# Altium PCB AT89S52精简开发板.PCBDOC (part 1 of 2)
Units mm, origin at the board's own origin, x right, y up, seen from the top; angles counter-clockwise.
Board outline 152.4 x 101.6 mm, 2 copper layers (Top Layer, Bottom Layer); 41 components, 53 nets, 208 pads, 4 vias.
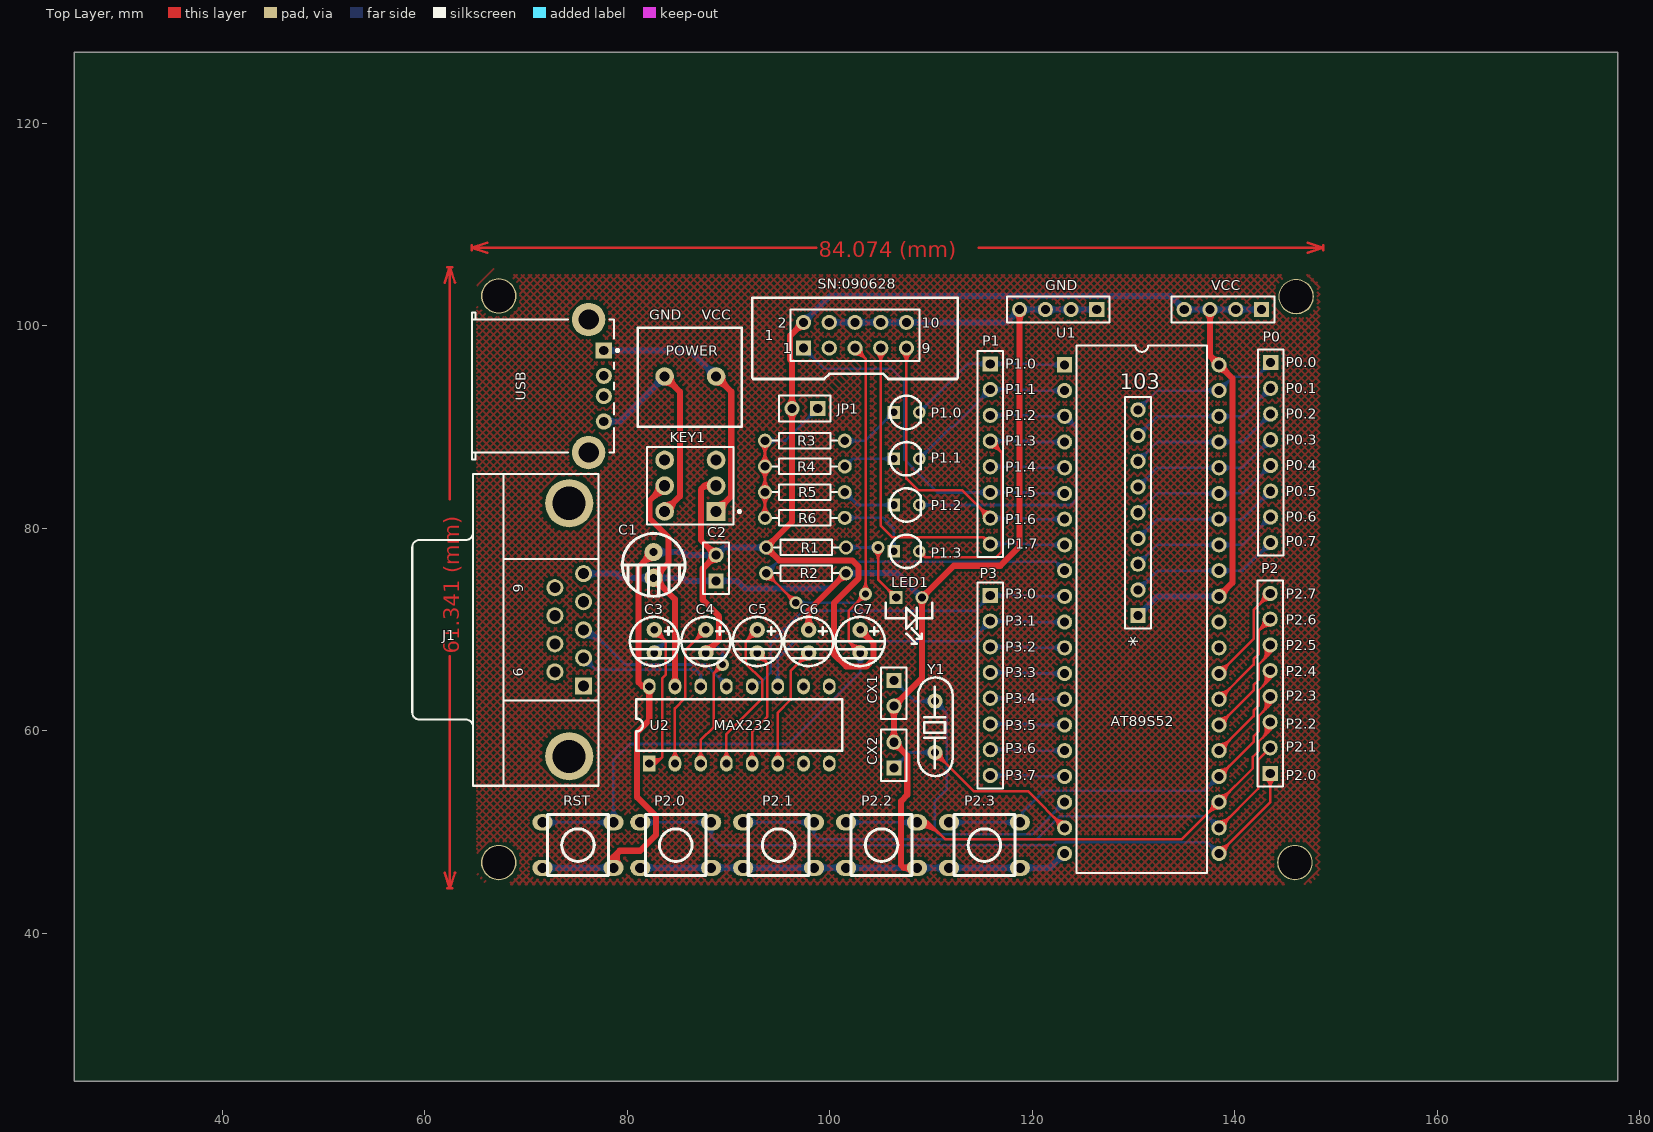
[diagram p0: Top Layer view]
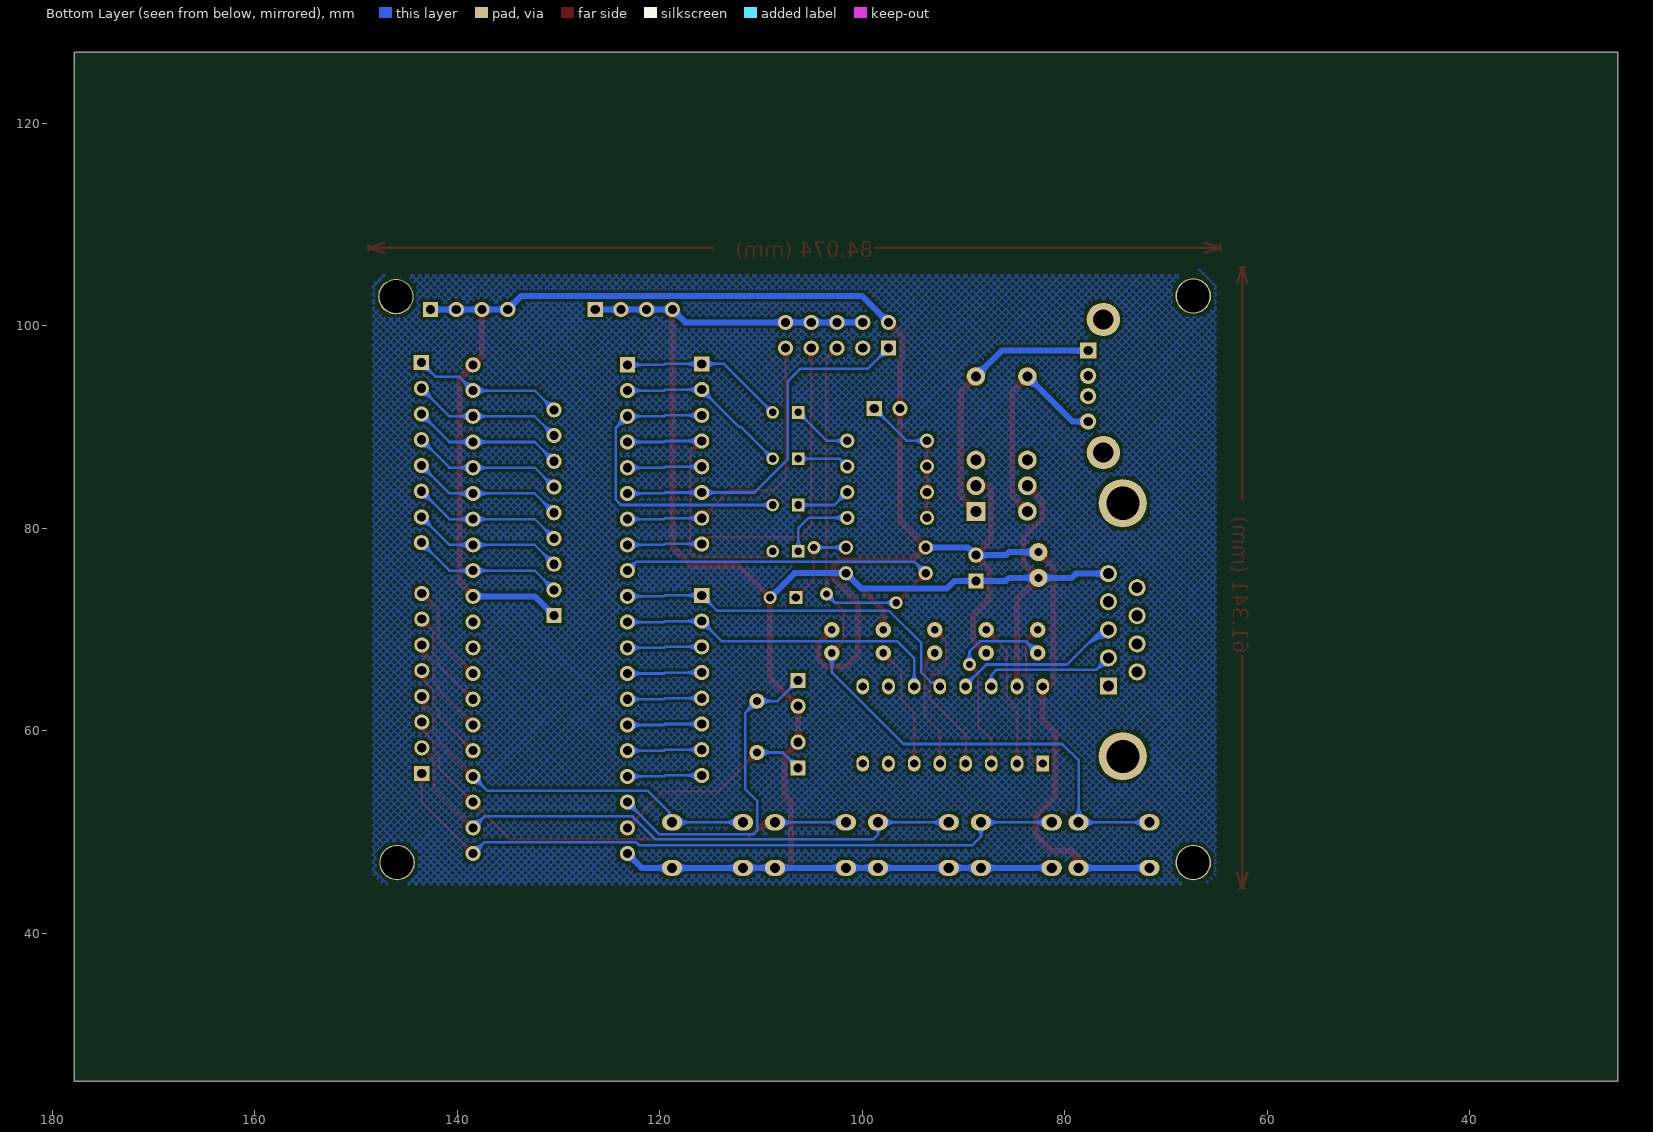
[diagram p1: Bottom Layer view, seen from below]

## Layer stack, top to bottom
Top Layer: signal copper 0.0356
Dielectric: dielectric 0.32, FR-4, Dk 4.8
Bottom Layer: signal copper 0.0356

## Board outline
25.4,25.4 177.8,25.4 177.8,127 25.4,127

## Design rules (kind name [scope] priority, off if disabled: settings)
Clearance [All] p1: gap=0.254
ComponentClearance [All] p1: gap=0.254 collisioncheckmode=3 verticalgap=0.254
PolygonConnect [All] p1: connectstyle=Relief reliefconductorwidth=0.254 reliefentries=4 polygonreliefangle="90 Angle"
RoutingVias [All] p1: holewidth=0.711 width=1.27 viastyle="Through Hole" minholewidth=0.711 minwidth=1.27 maxholewidth=0.711 maxwidth=1.27
SolderMaskExpansion [All] p1: expansion=0.102
TestPointUsage [All] p1: valid=0 allowmultiple=FALSE
Testpoint [All] p1: side=15 testpointundercomponent=TRUE minsize=1.016 maxsize=2.54 preferedsize=1.524 minholesize=0 maxholesize=1.016 preferedholesize=0.813 testpointgrid=0.025 style=1023 order=0-112345678
Width Width_4 [InNet('NetKEY1_6')] p1: maxlimit=0.6 minlimit=0.6 preferedwidth=0.6
Width Width_3 [InNet('NetKEY1_1')] p2: maxlimit=0.6 minlimit=0.6 preferedwidth=0.6
Width Width_2 [InNet('VCC')] p3: maxlimit=0.6 minlimit=0.6 preferedwidth=0.6
Width Width_1 [InNet('GND')] p4: maxlimit=0.6 minlimit=0.6 preferedwidth=0.6
Width [All] p5: maxlimit=0.254 minlimit=0.254 preferedwidth=0.254
17 further rules are at their usual default settings.

## Components (designator, comment, footprint, x,y, rotation, side; value= is the part's Value field where it differs from the comment)
1 "Download" HDR-2x5 102.489,97.917 r0 top
103 "" HDR-9 130.429,76.454 r270 top
C1 "100uF\25v" C-DJ-6 82.677,75.057 r270 top
C2 "CPDR" CPDR 88.773,76.073 r90 top
C3 "10uf" C-DJ-4 80.137,67.564 r270 top
C4 "10uf" C-DJ-4 85.217,67.564 r270 top
C5 "10uf" C-DJ-4 90.297,67.564 r270 top
C6 "10uf" C-DJ-4 95.377,67.564 r270 top
C7 "10uf" C-DJ-4 100.457,67.564 r270 top
CX1 "30p" HDR1X2 106.324,64.973 r270 top
CX2 "30p" HDR1X2 106.324,56.337 r90 top
GND "" HDR1X4 126.365,101.6 r180 top
J1 "D Connector 9" DSUB1.385-2H9 64.77,69.977 r90 top
JP1 "" HDR1X2 98.806,91.821 r180 top
KEY1 "SW-DPST" DPDT-6 86.233,84.201 r180 top
LED1 "LED" LED 108.585,72.644 r180 top
P0 "" HDR-8 143.51,83.693 r270 top
P1 "" HDR-8 115.824,83.566 r270 top
P1.0 "LED" LED_D 108.077,92.964 r0 top
P1.1 "LED" LED_D 108.077,88.392 r0 top
P1.2 "LED" LED_D 108.077,83.82 r0 top
P1.3 "LED" LED_D 108.077,79.248 r0 top
P2 "" HDR-8 143.51,68.453 r90 top
P2.0 "key1" an-6*6 78.613,53.848 r180 top
P2.1 "key2" an-6*6 88.773,53.848 r180 top
P2.2 "key3" an-6*6 98.933,53.848 r180 top
P2.3 "key4" an-6*6 109.093,53.848 r180 top
P3 "" HDR-8 115.824,60.706 r270 top
POWER "" JK128 88.265,93.853 r270 top
R1 "4.7k" RSE 97.663,78.105 r0 top
R2 "10k" RSE 97.663,75.565 r180 top
R3 "470" RSE 97.536,88.646 r0 top
R4 "470" RSE 97.536,86.106 r0 top
R5 "470" RSE 97.536,83.566 r0 top
R6 "470" RSE 97.536,81.026 r0 top
RST "" an-6*6 68.961,53.848 r180 top
U1 "AT89S52-24PI" DIP-40 130.81,72.009 r270 top
U2 "MAX232" DIP16 82.169,56.769 r90 top
USB "" USB-5V 75.184,90.424 r180 top
VCC "" HDR1X4 142.621,101.6 r180 top
Y1 "Y" JZ_ZC 110.388,62.941 r90 top

## Footprints (in the part's own frame and the unit in brackets; to place one, negate y for a bottom-side part, rotate by r counter-clockwise, add the part's x,y. Pads: shape width x height; smd on the part's side, far side on the other; paste and mask are expansions set on the pad)
an-6*6 [mm] "按键"
  oval 2x1.6 hole 1: 1(-9.675,7.381) 1(-2.675,7.381) 2(-9.675,2.881) 2(-2.675,2.881)
  silkscreen extent -9.17,2.13 -3.18,8.13
C-DJ-4 [mil] "电容4mm"
  round 60 hole 30: 1(-95,100) 2(-5,100)
  silkscreen extent -145,5 46,196
C-DJ-6 [mm] "电容6mm"
  round 1.8 hole 0.8: 1(-2.591,-0.076) 2(-0.051,-0.076)
  silkscreen extent -4.42,-3.18 1.78,3.02
CPDR [mm] "瓷片电容"
  rect 1.5x1.5 hole 0.9: 1(-1.27,0)
  round 1.5 hole 0.9: 2(1.27,0)
  silkscreen extent -2.54,-1.27 2.54,1.27
DIP16 [mil] "直插16管脚"
  rect 62x49.21 hole 32: 1(-0.15,-0.04)
  oval 62x49.21 hole 32: 2(-0.15,-100.04) 3(-0.15,-200.04) 4(-0.15,-300.04) 5(-0.15,-400.04) 6(-0.15,-500.04) 7(-0.15,-600.04) 8(-0.15,-700.04) 9(299.85,-700.04) 10(299.85,-600.04) 11(299.85,-500.04) 12(299.85,-400.04) 13(299.85,-300.04) 14(299.85,-200.04) 15(299.85,-100.04) 16(299.85,-0.04)
  silkscreen extent 50,-750 250,50
DIP-40 [mm] "直插40管脚"
  rect 1.5x1.5 hole 0.9: 1(-24.13,-7.62)
  round 1.5 hole 0.9: 2(-21.59,-7.62) 3(-19.05,-7.62) 4(-16.51,-7.62) 5(-13.97,-7.62) 6(-11.43,-7.62) 7(-8.89,-7.62) 8(-6.35,-7.62) 9(-3.81,-7.62) 10(-1.27,-7.62) 11(1.27,-7.62) 12(3.81,-7.62) 13(6.35,-7.62) 14(8.89,-7.62) 15(11.43,-7.62) 16(13.97,-7.62) 17(16.51,-7.62) 18(19.05,-7.62) 19(21.59,-7.62) 20(24.13,-7.62) 21(24.13,7.62) 22(21.59,7.62) 23(19.05,7.62) 24(16.51,7.62) 25(13.97,7.62) 26(11.43,7.62) 27(8.89,7.62) 28(6.35,7.62) 29(3.81,7.62) 30(1.27,7.62) 31(-1.27,7.62) 32(-3.81,7.62) 33(-6.35,7.62) 34(-8.89,7.62) 35(-11.43,7.62) 36(-13.97,7.62) 37(-16.51,7.62) 38(-19.05,7.62) 39(-21.59,7.62) 40(-24.13,7.62)
  silkscreen extent -26.05,-6.45 26.05,6.45
DPDT-6 [mm] "Double-Pole, Double-Throw Switch; 6 Leads"
  rect 1.85x1.85 hole 1.1: 1(-2.54,2.54)
  round 1.85 hole 1.1: 2(-2.54,0) 3(-2.54,-2.54) 4(2.54,-2.54) 5(2.54,0) 6(2.54,2.54)
  silkscreen extent -4.96,-3.81 4.28,3.81
DSUB1.385-2H9 [mm] "Connector; D Subminiature; 9 Position; Right Angle; Pitch 1.385 mm"
  rect 1.69x1.69 hole 1.09: 1(-5.54,-10.92)
  round 1.69 hole 1.09: 2(-2.77,-10.92) 3(0,-10.92) 4(2.77,-10.92) 5(5.54,-10.92) 6(-4.155,-8.08) 7(-1.385,-8.08) 8(1.385,-8.08) 9(4.155,-8.08)
  round 4.76 hole 3.26: 10(-12.495,-9.5) 11(12.495,-9.5)
  silkscreen extent -15.4,-12.4 15.4,6
HDR1X2 [mm] "Connector; Header; 2 Position"
  rect 1.5x1.5 hole 0.9: 1(0,0)
  round 1.5 hole 0.9: 2(2.54,0)
  silkscreen extent -1.27,-1.27 3.81,1.27
HDR1X4 [mm] "Connector; Header; 4 Position"
  rect 1.5x1.5 hole 0.9: 1(0,0)
  round 1.5 hole 0.9: 2(2.54,0) 3(5.08,0) 4(7.62,0)
  silkscreen extent -1.27,-1.27 8.89,1.27
HDR-2x5 [mm] "下载口"
  rect 1.5x1.5 hole 0.9: 1(-5.08,-0.127)
  round 1.5 hole 0.9: 2(-5.08,2.413) 3(-2.54,-0.127) 4(-2.54,2.413) 5(0,-0.127) 6(0,2.413) 7(2.54,-0.127) 8(2.54,2.413) 9(5.08,-0.127) 10(5.08,2.413)
  silkscreen extent -10.16,-3.17 10.16,4.83
HDR-8 [mm] "8排针"
  rect 1.5x1.5 hole 0.9: 1(-12.669,0.023)
  round 1.5 hole 0.9: 2(-10.129,0.023) 3(-7.589,0.023) 4(-5.049,0.023) 5(-2.509,0.023) 6(0.031,0.023) 7(2.571,0.023) 8(5.111,0.023)
  silkscreen extent -13.94,-1.25 6.38,1.29
HDR-9 [mm] "9排针"
  round 1.5 hole 0.9: 1(-15.24,0) 2(-12.7,0) 3(-10.16,0) 4(-7.62,0) 5(-5.08,0) 6(-2.54,0) 7(0,0) 8(2.54,0)
  rect 1.5x1.5 hole 0.9: 9(5.08,0)
  silkscreen extent -16.51,-1.27 6.35,1.27
JK128 [mil] "接线端子"
  round 71.81 hole 39.37: 1(-45,20) 2(-45,-180)
  silkscreen extent -235,-285 150,120
JZ_ZC [mil] "晶振"
  round 60 hole 30: 1(-200,0) 2(0,0)
  silkscreen extent -292,-68 92,65
LED [mil] "发光二极管"
  rect 50x50 hole 32: 1(80,-20)
  round 50 hole 32: 2(-20,-20)
  silkscreen extent -60,0 120,160
LED_D [mm] "发光二极管_3mm"
  rect 1.25x1.25 hole 0.75: 1(-1.778,-1.524)
  round 1.25 hole 0.75: 2(0.762,-1.524)
  silkscreen extent -2.16,-3.17 0.89,0.13
RSE [mm] "直插电阻1/8W"
  round 1.4 hole 0.85: 1(-3.937,0) 2(3.937,0)
  silkscreen extent -3.17,-0.76 3.17,0.76
USB-5V [mm] "USB接口"
  rect 1.6x1.6 hole 0.92: 1(-2.503,-7.123)
  round 1.6 hole 0.92: 2(-2.503,-4.624) 3(-2.503,-2.624) 4(-2.503,-0.124)
  round 3.3 hole 2: 5(-1.002,2.947) 6(-1.002,-10.193)
  silkscreen extent -3.98,-10.87 10.5,3.63

## Part data
1: library part "Header 5X2", "Header, 5-Pin, Dual row"
103: library part PZ_9, "排针——9"
C1 C3 C4 C5 C6 C7: library part "CAPACITOR POL", "Capacitor"
C2: "瓷片电容"
CX1 CX2: library part CAP, "Capacitor"
GND USB VCC: library part "Header 4", "Header, 4-Pin"
J1: "Receptacle Assembly, 9 Position, Right Angle"
JP1 POWER: library part "Header 2", "Header, 2-Pin"
KEY1: "Double-Pole, Single-Throw Switch"
P0 P1 P2 P3: library part PZ_8, "排针——8"
P2.0 P2.1 P2.2 P2.3: library part key
R1 R2 R3 R4 R5 R6: library part RES2
RST: library part SW-PB, "Switch"
U1: library part AT89S52-P, "8 位微处理器/40引脚"
Y1: library part CRYSTAL, "Crystal"

## Free pads (board coordinates)
  round 3.5 hole 3.25: 0(67.31,46.99) 0(67.31,102.946) 0(145.923,46.99) 0(146.05,102.87)

## Via types
v1: diameter 1.27, hole 0.711, Top Layer to Bottom Layer, 4 vias

## Nets (pads, with @x,y where several pads share a name; then routed paths per layer and width w, separated by ;. In a path a pad name is that pad's centre, name@x,y a point inside that pad or via, vN(x,y) a via of type N, cw(c..) or ccw(c..) an arc to the next point about the centre after c; other vN are vias at no path point)
GND: 1.4 1.6 1.8 1.10 C1.2 C2.1 C6.1 CX1.2 CX2.2 GND.1 GND.2 GND.3 GND.4 J1.5 KEY1.5 LED1.2 P2.0.1 P2.1.1 P2.2.1 P2.3.1 R2.1 U1.20 U2.15 | length 292.6
  Top Layer w0.6: C1.2@82.601,74.508 cw(c82.601,73.059) 83.625,74.084 cw(c84.649,75.108) 83.201,75.108 cw(c84.649,75.108) 83.625,76.132 cw(c82.601,77.156) C1.2@82.601,75.708 ; KEY1.5@83.068,84.201 cw(c81.559,84.201) 82.626,83.134 cw(c83.693,82.067) KEY1.5@83.693,83.576 ; KEY1.5@83.693,84.201 82.194,82.702 82.194,80.975 84.074,79.096 84.074,76.581 C1.2@82.601,75.108 84.71,72.999 U2.15@84.71,64.385 ; U2.15@84.48,64.777 ccw(c83.925,65.332) 84.71,65.332 ccw(c85.495,65.332) U2.15@84.94,64.777 ; C6.1@97.59,70.304 ccw(c96.802,71.092) 97.917,71.092 ccw(c99.032,71.092) C6.1@98.244,70.304 ; C6.1@97.917,69.977 97.917,71.882 R2.1@101.6,75.565 ; R2.1@101.2,75.565 cw(c100.234,75.565) 100.917,74.882 cw(c101.6,74.199) R2.1@101.6,75.165 ; CX2.2@106.006,59.195 ccw(c105.238,59.964) 106.324,59.964 ccw(c107.411,59.964) CX2.2@106.643,59.195 ; CX1.2@106.006,62.115 cw(c105.238,61.347) 106.324,61.347 cw(c107.411,61.347) CX1.2@106.643,62.115 ; CX2.2@106.324,58.427 cw(c106.324,57.341) 107.093,58.109 cw(c107.861,58.877) CX2.2@106.774,58.877 ; CX1.2@106.324,62.883 ccw(c106.324,63.97) 107.093,63.201 ccw(c107.861,62.433) CX1.2@106.774,62.433 ; P2.2.1@108.032,46.138 ccw(c107.304,45.499) 107.304,46.467 ; P2.2.1@108.032,46.797 cw(c107.304,47.435) 107.304,46.467 ; P2.2.1@108.608,46.467 107.304,46.467 ; LED1.2@108.856,72.915 cw(c108.284,72.343) 109.093,72.343 cw(c109.902,72.343) LED1.2@109.33,72.915 ; LED1.2@109.093,73.487 ccw(c109.093,74.296) 109.665,73.724 ccw(c110.237,73.152) LED1.2@109.428,73.152 ; GND.4@118.427,101.282 cw(c117.659,100.514) 118.745,100.514 cw(c119.831,100.514) GND.4@119.063,101.282 ; GND.4@118.745,101.6 118.745,78.207 116.84,76.302 112.243,76.302 LED1.2@109.093,73.152 109.093,65.202 CX1.2@106.324,62.433 CX2.2@106.324,58.877 107.645,57.556 107.645,53.67 107.036,53.061 107.036,46.736 107.304,46.467
  Bottom Layer w0.6: J1.5@75.69,75.517 78.918,75.517 79.327,75.108 C1.2@82.601,75.108 85.522,75.108 85.827,74.803 C2.1@88.773,74.803 90.881,74.803 91.618,74.066 100.101,74.066 R2.1@101.6,75.565 106.68,75.565 LED1.2@109.093,73.152 ; J1.5@76.075,75.132 cw(c77.006,74.201) 77.006,75.517 cw(c77.006,76.833) J1.5@76.075,75.902 ; P2.0.1@81.288,46.467 P2.0.1@88.288,46.467 P2.1.1@91.448,46.467 P2.1.1@98.448,46.467 P2.2.1@101.608,46.467 P2.2.1@108.608,46.467 P2.3.1@111.768,46.467 P2.3.1@118.768,46.467 121.778,46.467 U1.20@123.19,47.879 ; P2.0.1@81.842,46.114 cw(c82.695,45.26) 82.695,46.467 cw(c82.695,47.674) P2.0.1@81.842,46.821 ; C1.2@82.177,74.684 ccw(c81.152,73.659) 81.152,75.108 ccw(c81.152,76.556) C1.2@82.177,75.532 ; C1.2@83.025,74.684 cw(c84.049,73.659) 84.049,75.108 cw(c84.049,76.556) C1.2@83.025,75.532 ; P2.0.1@87.734,46.114 ccw(c86.881,45.26) 86.881,46.467 ccw(c86.881,47.674) P2.0.1@87.734,46.821 ; C2.1@88.455,74.485 ccw(c87.687,73.717) 87.687,74.803 ccw(c87.687,75.889) C2.1@88.455,75.121 ; P2.0.1@88.842,46.114 cw(c89.695,45.26) 89.695,46.467 cw(c89.695,47.674) P2.0.1@88.842,46.821 ; C2.1@89.091,74.485 cw(c89.859,73.717) 89.859,74.803 cw(c89.859,75.889) C2.1@89.091,75.121 ; P2.1.1@90.894,46.114 ccw(c90.041,45.26) 90.041,46.467 ccw(c90.041,47.674) P2.1.1@90.894,46.821 ; P2.1.1@92.002,46.114 cw(c92.855,45.26) 92.855,46.467 cw(c92.855,47.674) P2.1.1@92.002,46.821 ; P2.1.1@97.894,46.114 ccw(c97.041,45.26) 97.041,46.467 ccw(c97.041,47.674) P2.1.1@97.894,46.821 ; P2.1.1@99.002,46.114 cw(c99.855,45.26) 99.855,46.467 cw(c99.855,47.674) P2.1.1@99.002,46.821 ; 1.4@99.949,100.33 1.6@102.489,100.33 1.8@105.029,100.33 1.10@107.569,100.33 117.475,100.33 GND.4@118.745,101.6 GND.3@121.285,101.6 GND.2@123.825,101.6 GND.1@126.365,101.6 ; 1.4@100.267,100.012 cw(c101.035,99.244) 101.035,100.33 cw(c101.035,101.416) 1.4@100.267,100.648 ; P2.2.1@101.054,46.114 ccw(c100.201,45.26) 100.201,46.467 ccw(c100.201,47.674) P2.2.1@101.054,46.821 ; R2.1@101.2,75.565 cw(c100.234,75.565) 100.917,74.882 cw(c101.6,74.199) R2.1@101.6,75.165 ; R2.1@101.883,75.282 cw(c102.566,74.599) 102.566,75.565 cw(c102.566,76.531) R2.1@101.883,75.848 ; P2.2.1@102.162,46.114 cw(c103.015,45.26) 103.015,46.467 cw(c103.015,47.674) P2.2.1@102.162,46.821 ; 1.6@102.171,100.012 ccw(c101.403,99.244) 101.403,100.33 ccw(c101.403,101.416) 1.6@102.171,100.648 ; 1.6@102.807,100.012 cw(c103.575,99.244) 103.575,100.33 cw(c103.575,101.416) 1.6@102.807,100.648 ; 1.8@104.711,100.012 ccw(c103.943,99.244) 103.943,100.33 ccw(c103.943,101.416) 1.8@104.711,100.648 ; 1.8@105.347,100.012 cw(c106.115,99.244) 106.115,100.33 cw(c106.115,101.416) 1.8@105.347,100.648 ; 1.10@107.251,100.012 ccw(c106.483,99.244) 106.483,100.33 ccw(c106.483,101.416) 1.10@107.251,100.648 ; 1.10@107.887,100.012 cw(c108.655,99.244) 108.655,100.33 cw(c108.655,101.416) 1.10@107.887,100.648 ; P2.2.1@108.054,46.114 ccw(c107.201,45.26) 107.201,46.467 ccw(c107.201,47.674) P2.2.1@108.054,46.821 ; LED1.2@108.758,73.152 ccw(c107.949,73.152) 108.521,73.724 ccw(c109.093,74.296) LED1.2@109.093,73.487 ; P2.2.1@109.162,46.114 cw(c110.015,45.26) 110.015,46.467 cw(c110.015,47.674) P2.2.1@109.162,46.821 ; P2.3.1@111.214,46.114 ccw(c110.361,45.26) 110.361,46.467 ccw(c110.361,47.674) P2.3.1@111.214,46.821 ; P2.3.1@112.322,46.114 cw(c113.175,45.26) 113.175,46.467 cw(c113.175,47.674) P2.3.1@112.322,46.821 ; P2.3.1@118.214,46.114 ccw(c117.361,45.26) 117.361,46.467 ccw(c117.361,47.674) P2.3.1@118.214,46.821 ; GND.4@118.295,101.6 cw(c117.209,101.6) 117.977,100.832 cw(c118.745,100.064) GND.4@118.745,101.15 ; GND.4@119.063,101.282 cw(c119.831,100.514) 119.831,101.6 cw(c119.831,102.686) GND.4@119.063,101.918 ; P2.3.1@119.322,46.114 cw(c120.175,45.26) 120.175,46.467 cw(c120.175,47.674) P2.3.1@119.322,46.821 ; GND.3@120.967,101.282 ccw(c120.199,100.514) 120.199,101.6 ccw(c120.199,102.686) GND.3@120.967,101.918 ; GND.3@121.603,101.282 cw(c122.371,100.514) 122.371,101.6 cw(c122.371,102.686) GND.3@121.603,101.918 ; U1.20@122.74,47.879 cw(c121.654,47.879) 122.422,47.111 cw(c123.19,46.343) U1.20@123.19,47.429 ; GND.2@123.507,101.282 ccw(c122.739,100.514) 122.739,101.6 ccw(c122.739,102.686) GND.2@123.507,101.918 ; GND.2@124.143,101.282 cw(c124.911,100.514) 124.911,101.6 cw(c124.911,102.686) GND.2@124.143,101.918 ; GND.1@126.047,101.282 ccw(c125.279,100.514) 125.279,101.6 ccw(c125.279,102.686) GND.1@126.047,101.918
NetC3_1: C3.1 U2.1 | length 23
  Top Layer w0.254: U2.1@82.007,56.72 ccw(c82.39,57.21) 82.83,56.77 ; U2.1@82.164,56.92 ccw(c82.569,57.437) 83.033,56.973 ; U2.1@82.17,56.765 82.17,56.744 82.804,56.744 ; U2.1@82.32,57.12 ccw(c82.747,57.665) 83.236,57.176 ; U2.1@82.477,57.32 ccw(c82.925,57.893) 83.439,57.379 ; U2.1@82.648,56.627 cw(c82.804,56.582) 82.804,56.744 ; U2.1@82.658,56.863 ccw(c82.804,56.892) 82.804,56.744 ; C3.1@82.677,69.342 cw(c82.677,67.809) 83.761,68.893 cw(c84.845,69.977) C3.1@83.312,69.977 ; C3.1@82.677,69.596 cw(c82.677,68.676) 83.327,69.327 cw(c83.978,69.977) C3.1@83.058,69.977 ; C3.1@82.677,69.977 83.82,68.834 83.82,65.557 83.439,65.176 83.439,57.379 ; 82.804,56.744 83.439,57.379
NetC3_2: C3.2 U2.3 | length 29.2
  Top Layer w0.254: U2.3@86.898,57.28 ccw(c86.048,58.13) 87.25,58.13 ccw(c88.452,58.13) U2.3@87.602,57.28 ; U2.3@87.25,56.765 87.25,59.081 88.544,60.376 88.544,65.684 ; v1@88.9,66.546 cw(c87.686,66.543) 88.544,65.684 ; v1@89.406,66.04 ccw(c89.403,64.826) 88.544,65.684 ; v1(89.408,66.548) 88.544,65.684
  Bottom Layer w0.254: C3.2@82.677,67.691 83.82,68.834 88.392,68.834 89.408,67.818 v1(89.408,66.548) ; C3.2@82.677,68.072 ccw(c82.677,68.992) 83.327,68.341 ccw(c83.978,67.691) C3.2@83.058,67.691 ; C3.2@82.677,68.326 ccw(c82.677,69.859) 83.761,68.775 ccw(c84.845,67.691) C3.2@83.312,67.691 ; v1@89.049,66.907 ccw(c88.182,67.774) 89.408,67.774 ccw(c90.634,67.774) v1@89.767,66.907
NetC4_1: C4.1 U2.2 | length 20.2
  Top Layer w0.254: U2.2@84.358,57.28 ccw(c83.508,58.13) 84.71,58.13 ccw(c85.912,58.13) U2.2@85.062,57.28 ; U2.2@84.71,56.765 84.71,62.206 85.725,63.221 85.725,67.945 C4.1@87.757,69.977 ; C4.1@87.122,69.977 cw(c85.589,69.977) 86.673,68.893 cw(c87.757,67.809) C4.1@87.757,69.342 ; C4.1@87.376,69.977 cw(c86.456,69.977) 87.107,69.327 cw(c87.757,68.676) C4.1@87.757,69.596
NetC5_1: C5.1 U2.4 | length 21.6
  Top Layer w0.254: U2.4@89.438,57.28 ccw(c88.588,58.13) 89.79,58.13 ccw(c90.992,58.13) U2.4@90.142,57.28 ; U2.4@89.79,56.765 89.79,59.675 93.336,63.221 93.336,65.008 91.694,66.65 91.694,68.834 C5.1@92.837,69.977 ; C5.1@92.202,69.977 cw(c90.669,69.977) 91.753,68.893 cw(c92.837,67.809) C5.1@92.837,69.342 ; C5.1@92.456,69.977 cw(c91.536,69.977) 92.187,69.327 cw(c92.837,68.676) C5.1@92.837,69.596
NetC5_2: C5.2 U2.5 | length 17.3
  Top Layer w0.254: U2.5@91.978,57.28 ccw(c91.128,58.13) 92.33,58.13 ccw(c93.532,58.13) U2.5@92.682,57.28 ; U2.5@92.33,56.765 92.33,59.894 93.844,61.408 93.844,66.684 ; C5.2@92.837,67.691 93.844,66.684 ; C5.2@92.857,67.311 cw(c92.898,66.544) 93.441,67.087 cw(c93.984,67.63) C5.2@93.217,67.671 ; C5.2@92.871,67.057 cw(c92.939,65.779) 93.844,66.684 ; C5.2@93.471,67.657 ccw(c94.749,67.589) 93.844,66.684
NetC6_2: C6.2 U2.6 | length 17.9
  Top Layer w0.254: U2.6@94.518,57.28 ccw(c93.668,58.13) 94.87,58.13 ccw(c96.072,58.13) U2.6@95.222,57.28 ; U2.6@94.87,56.765 94.87,61.799 96.139,63.068 96.139,65.913 C6.2@97.917,67.691 ; C6.2@97.282,67.691 cw(c95.749,67.691) 96.833,66.607 cw(c97.917,65.523) C6.2@97.917,67.056 ; C6.2@97.536,67.691 cw(c96.616,67.691) 97.267,67.041 cw(c97.917,66.39) C6.2@97.917,67.31
NetJ1_2: J1.2 U2.14 | length 18.9
  Bottom Layer w0.254: J1.2@75.69,67.207 76.857,66.04 ; J1.2@75.706,66.743 cw(c75.742,65.75) 76.444,66.453 cw(c77.147,67.155) J1.2@76.154,67.191 ; J1.2@75.715,66.489 cw(c75.77,64.953) 76.857,66.04 ; J1.2@76.408,67.182 ccw(c77.944,67.127) 76.857,66.04 ; U2.14@86.955,64.949 ccw(c86.526,65.532) 87.25,65.532 ; U2.14@87.25,64.385 87.25,65.532 ; U2.14@87.545,64.949 cw(c87.974,65.532) 87.25,65.532 ; 76.857,66.04 86.742,66.04 87.25,65.532
NetJ1_3: J1.3 U2.13 | length 26.5
  Bottom Layer w0.254: J1.3@75.69,69.259 cw(c75.69,65.926) 78.046,68.283 ; J1.3@75.69,69.513 cw(c75.69,66.794) 77.613,68.717 ; J1.3@75.69,69.767 cw(c75.69,67.661) 77.179,69.15 ; J1.3@75.69,69.977 76.352,69.977 79.781,66.548 87.733,66.548 89.79,64.491 U2.13@89.79,64.385 ; J1.3@75.69,70.021 cw(c75.69,68.528) 76.746,69.584 ; 88.843,65.438 ccw(c89.79,66.385) U2.13@89.79,65.046 ; 88.98,65.3 cw(c88.227,64.548) U2.13@89.292,64.548 ; 89.276,65.004 ccw(c89.79,65.518) U2.13@89.79,64.792
NetJP1_1: JP1.1 R3.1 R4.1 R5.1 R6.1 | length 41.6
  Top Layer w0.254: R6.1@93.194,81.431 ccw(c92.216,82.409) 93.599,82.409 ccw(c94.982,82.409) R6.1@94.004,81.431 ; R5.1@93.194,83.161 cw(c92.216,82.183) 93.599,82.183 cw(c94.982,82.183) R5.1@94.004,83.161 ; R5.1@93.194,83.971 ccw(c92.216,84.949) 93.599,84.949 ccw(c94.982,84.949) R5.1@94.004,83.971 ; R4.1@93.194,85.701 cw(c92.216,84.723) 93.599,84.723 cw(c94.982,84.723) R4.1@94.004,85.701 ; R4.1@93.194,86.511 ccw(c92.216,87.489) 93.599,87.489 ccw(c94.982,87.489) R4.1@94.004,86.511 ; R3.1@93.194,88.241 cw(c92.216,87.263) 93.599,87.263 cw(c94.982,87.263) R3.1@94.004,88.241 ; R6.1@93.373,81.252 ccw(c92.829,81.796) 93.599,81.796 ccw(c94.369,81.796) R6.1@93.825,81.252 ; R5.1@93.373,83.34 cw(c92.829,82.796) 93.599,82.796 cw(c94.369,82.796) R5.1@93.825,83.34 ; R5.1@93.373,83.792 ccw(c92.829,84.336) 93.599,84.336 ccw(c94.369,84.336) R5.1@93.825,83.792 ; R4.1@93.373,85.88 cw(c92.829,85.336) 93.599,85.336 cw(c94.369,85.336) R4.1@93.825,85.88 ; R4.1@93.373,86.332 ccw(c92.829,86.876) 93.599,86.876 ccw(c94.369,86.876) R4.1@93.825,86.332 ; R3.1@93.373,88.42 cw(c92.829,87.876) 93.599,87.876 cw(c94.369,87.876) R3.1@93.825,88.42 ; R6.1@93.599,81.026 R5.1@93.599,83.566 R4.1@93.599,86.106 R3.1@93.599,88.646
  Bottom Layer w0.254: R3.1@93.599,88.646 95.631,88.646 JP1.1@98.806,91.821 ; R3.1@93.825,88.42 cw(c94.369,87.876) 94.369,88.646 cw(c94.369,89.416) R3.1@93.825,88.872 ; R3.1@94.004,88.241 cw(c94.982,87.263) 94.982,88.646 cw(c94.982,90.029) R3.1@94.004,89.051 ; JP1.1@98.183,91.821 cw(c96.679,91.821) 97.742,90.757 cw(c98.806,89.694) JP1.1@98.806,91.198 ; JP1.1@98.437,91.821 cw(c97.546,91.821) 98.176,91.191 cw(c98.806,90.561) JP1.1@98.806,91.452
NetKEY1_1: KEY1.1 POWER.1 USB.1 | length 35.6
  Top Layer w0.6: KEY1.1@88.773,81.661 90.272,83.16 90.272,93.497 POWER.1@88.773,94.996 ; KEY1.1@88.773,82.286 ccw(c88.773,83.795) 89.84,82.728 ccw(c90.907,81.661) KEY1.1@89.398,81.661 ; POWER.1@88.773,94.384 cw(c88.773,92.906) 89.818,93.951 cw(c90.863,94.996) POWER.1@89.385,94.996
  Bottom Layer w0.6: USB.1@77.687,97.547 86.222,97.547 POWER.1@88.773,94.996 ; USB.1@78.04,97.194 cw(c78.894,96.34) 78.894,97.547 cw(c78.894,98.755) USB.1@78.04,97.901 ; POWER.1@88.161,94.996 ccw(c86.683,94.996) 87.728,96.041 ccw(c88.773,97.086) POWER.1@88.773,95.608
NetKEY1_6: KEY1.6 POWER.2 USB.4 | length 31.3
  Top Layer w0.6: KEY1.6@83.693,81.661 85.192,83.16 85.192,93.497 POWER.2@83.693,94.996 ; KEY1.6@83.693,82.286 ccw(c83.693,83.795) 84.76,82.728 ccw(c85.827,81.661) KEY1.6@84.318,81.661 ; POWER.2@83.693,94.384 cw(c83.693,92.906) 84.738,93.951 cw(c85.783,94.996) POWER.2@84.305,94.996
  Bottom Layer w0.6: USB.4@77.687,90.548 79.245,90.548 POWER.2@83.693,94.996 ; USB.4@78.04,90.194 cw(c78.894,89.34) 78.894,90.548 cw(c78.894,91.755) USB.4@78.04,90.901 ; POWER.2@83.081,94.996 cw(c81.603,94.996) 82.648,93.951 cw(c83.693,92.906) POWER.2@83.693,94.384
NetLED1_1: LED1.1 R1.2 | length 18
  Top Layer w0.254: v1@104.416,77.746 cw(c103.549,76.879) 104.775,76.879 cw(c106.001,76.879) v1@105.134,77.746 ; v1(104.775,78.105) 104.775,74.93 LED1.1@106.553,73.152 ; LED1.1@106.045,73.152 ccw(c104.819,73.152) 105.686,74.019 ccw(c106.553,74.886) LED1.1@106.553,73.66
  Bottom Layer w0.254: R1.2@101.6,78.105 v1(104.775,78.105) ; R1.2@101.826,77.879 cw(c102.37,77.335) 102.37,78.105 cw(c102.37,78.875) R1.2@101.826,78.331 ; R1.2@102.005,77.7 cw(c102.983,76.722) 102.983,78.105 cw(c102.983,79.488) R1.2@102.005,78.51 ; v1@104.416,77.746 ccw(c103.549,76.879) 103.549,78.105 ccw(c103.549,79.331) v1@104.416,78.464
NetP1.0_1: P1.0.1 R3.2 | length 11.3
  Bottom Layer w0.254: R3.2@101.473,88.646 103.505,88.646 P1.0.1@106.299,91.44 ; R3.2@101.699,88.42 cw(c102.243,87.876) 102.243,88.646 cw(c102.243,89.416) R3.2@101.699,88.872 ; R3.2@101.878,88.241 cw(c102.856,87.263) 102.856,88.646 cw(c102.856,90.029) R3.2@101.878,89.051 ; P1.0.1@105.801,91.44 cw(c104.599,91.44) 105.449,90.59 cw(c106.299,89.74) P1.0.1@106.299,90.942
NetP1.1_1: P1.1.1 R4.2 | length 8.5
  Bottom Layer w0.254: R4.2@101.473,86.106 102.235,86.868 ; R4.2@101.582,86.668 ccw(c101.721,87.382) 102.235,86.868 ; R4.2@102.035,86.215 cw(c102.749,86.354) 102.235,86.868 ; P1.1.1@105.947,86.516 ccw(c105.097,85.666) 105.097,86.868 ccw(c105.097,88.07) P1.1.1@105.947,87.22 ; P1.1.1@106.299,86.868 102.235,86.868
NetP1.2_1: P1.2.1 R5.2 | length 10.6
  Bottom Layer w0.254: R5.2@101.473,82.993 cw(c101.473,81.61) 102.451,82.588 cw(c103.429,83.566) R5.2@102.046,83.566 ; R5.2@101.473,83.247 cw(c101.473,82.477) 102.018,83.021 cw(c102.562,83.566) R5.2@101.792,83.566 ; R5.2@101.473,83.566 102.743,82.296 P1.2.1@106.299,82.296 ; P1.2.1@105.947,81.944 ccw(c105.097,81.094) 105.097,82.296 ccw(c105.097,83.498) P1.2.1@105.947,82.648
NetP1.3_1: P1.3.1 R6.2 | length 12.8
  Bottom Layer w0.254: R6.2@101.473,81.026 105.283,81.026 106.299,80.01 P1.3.1@106.299,77.724 ; R6.2@101.699,80.8 cw(c102.243,80.256) 102.243,81.026 cw(c102.243,81.796) R6.2@101.699,81.252 ; R6.2@101.878,80.621 cw(c102.856,79.643) 102.856,81.026 cw(c102.856,82.409) R6.2@101.878,81.431 ; P1.3.1@105.947,78.076 ccw(c105.097,78.926) 106.299,78.926 ccw(c107.501,78.926) P1.3.1@106.651,78.076
P0.0: 103.1 P0.1 U1.39 | length 30.1
  Bottom Layer w0.254: 103.1@130.429,91.694 132.334,93.599 U1.39@138.43,93.599 139.802,94.971 142.142,94.971 P0.1@143.533,96.362 ; 103.1@130.429,92.063 ccw(c130.429,92.954) 131.059,92.324 ccw(c131.689,91.694) 103.1@130.798,91.694 ; 103.1@130.429,92.317 ccw(c130.429,93.821) 131.493,92.758 ccw(c132.556,91.694) 103.1@131.052,91.694 ; U1.39@137.989,93.158 ccw(c136.926,92.095) 136.926,93.599 ccw(c136.926,95.103) U1.39@137.989,94.04 ; U1.39@138.169,93.338 ccw(c137.539,92.708) 137.539,93.599 ccw(c137.539,94.49) U1.39@138.169,93.86 ; U1.39@138.43,93.968 ccw(c138.43,94.859) 139.06,94.229 ccw(c139.69,93.599) U1.39@138.799,93.599 ; U1.39@138.43,94.222 ccw(c138.43,95.726) 139.494,94.663 ccw(c140.557,93.599) U1.39@139.053,93.599 ; P0.1@142.91,96.362 cw(c141.406,96.362) 142.469,95.298 cw(c143.533,94.235) P0.1@143.533,95.739 ; P0.1@143.164,96.362 cw(c142.273,96.362) 142.903,95.732 cw(c143.533,95.102) P0.1@143.533,95.993
P0.1: 103.2 P0.2 U1.38 | length 30.1
  Bottom Layer w0.254: 103.2@130.429,89.154 132.334,91.059 U1.38@138.43,91.059 140.77,91.059 P0.2@143.533,93.822 ; 103.2@130.429,89.523 ccw(c130.429,90.414) 131.059,89.784 ccw(c131.689,89.154) 103.2@130.798,89.154 ; 103.2@130.429,89.777 ccw(c130.429,91.281) 131.493,90.218 ccw(c132.556,89.154) 103.2@131.052,89.154 ; U1.38@137.989,90.618 ccw(c136.926,89.555) 136.926,91.059 ccw(c136.926,92.563) U1.38@137.989,91.5 ; U1.38@138.169,90.798 ccw(c137.539,90.168) 137.539,91.059 ccw(c137.539,91.95) U1.38@138.169,91.32 ; U1.38@138.691,90.798 cw(c139.321,90.168) 139.321,91.059 cw(c139.321,91.95) U1.38@138.691,91.32 ; U1.38@138.871,90.618 cw(c139.934,89.555) 139.934,91.059 cw(c139.934,92.563) U1.38@138.871,91.5 ; P0.2@142.91,93.822 cw(c141.406,93.822) 142.469,92.758 cw(c143.533,91.695) P0.2@143.533,93.199 ; P0.2@143.164,93.822 cw(c142.273,93.822) 142.903,93.192 cw(c143.533,92.562) P0.2@143.533,93.453
P0.2: 103.3 P0.3 U1.37 | length 30.1
  Bottom Layer w0.254: 103.3@130.429,86.614 132.334,88.519 U1.37@138.43,88.519 140.77,88.519 P0.3@143.533,91.282 ; 103.3@130.429,86.983 ccw(c130.429,87.874) 131.059,87.244 ccw(c131.689,86.614) 103.3@130.798,86.614 ; 103.3@130.429,87.237 ccw(c130.429,88.741) 131.493,87.678 ccw(c132.556,86.614) 103.3@131.052,86.614 ; U1.37@137.989,88.078 ccw(c136.926,87.015) 136.926,88.519 ccw(c136.926,90.023) U1.37@137.989,88.96 ; U1.37@138.169,88.258 ccw(c137.539,87.628) 137.539,88.519 ccw(c137.539,89.41) U1.37@138.169,88.78 ; U1.37@138.691,88.258 cw(c139.321,87.628) 139.321,88.519 cw(c139.321,89.41) U1.37@138.691,88.78 ; U1.37@138.871,88.078 cw(c139.934,87.015) 139.934,88.519 cw(c139.934,90.023) U1.37@138.871,88.96 ; P0.3@142.91,91.282 cw(c141.406,91.282) 142.469,90.218 cw(c143.533,89.155) P0.3@143.533,90.659 ; P0.3@143.164,91.282 cw(c142.273,91.282) 142.903,90.652 cw(c143.533,90.022) P0.3@143.533,90.913
P0.3: 103.4 P0.4 U1.36 | length 30.1
  Bottom Layer w0.254: 103.4@130.429,84.074 132.334,85.979 U1.36@138.43,85.979 140.77,85.979 P0.4@143.533,88.742 ; 103.4@130.429,84.443 ccw(c130.429,85.334) 131.059,84.704 ccw(c131.689,84.074) 103.4@130.798,84.074 ; 103.4@130.429,84.697 ccw(c130.429,86.201) 131.493,85.138 ccw(c132.556,84.074) 103.4@131.052,84.074 ; U1.36@137.989,85.538 ccw(c136.926,84.475) 136.926,85.979 ccw(c136.926,87.483) U1.36@137.989,86.42 ; U1.36@138.169,85.718 ccw(c137.539,85.088) 137.539,85.979 ccw(c137.539,86.87) U1.36@138.169,86.24 ; U1.36@138.691,85.718 cw(c139.321,85.088) 139.321,85.979 cw(c139.321,86.87) U1.36@138.691,86.24 ; U1.36@138.871,85.538 cw(c139.934,84.475) 139.934,85.979 cw(c139.934,87.483) U1.36@138.871,86.42 ; P0.4@142.91,88.742 cw(c141.406,88.742) 142.469,87.678 cw(c143.533,86.615) P0.4@143.533,88.119 ; P0.4@143.164,88.742 cw(c142.273,88.742) 142.903,88.112 cw(c143.533,87.482) P0.4@143.533,88.373
P0.4: 103.5 P0.5 U1.35 | length 30.1
  Bottom Layer w0.254: 103.5@130.429,81.534 132.334,83.439 U1.35@138.43,83.439 140.77,83.439 P0.5@143.533,86.202 ; 103.5@130.429,81.903 ccw(c130.429,82.794) 131.059,82.164 ccw(c131.689,81.534) 103.5@130.798,81.534 ; 103.5@130.429,82.157 ccw(c130.429,83.661) 131.493,82.598 ccw(c132.556,81.534) 103.5@131.052,81.534 ; U1.35@137.989,82.998 ccw(c136.926,81.935) 136.926,83.439 ccw(c136.926,84.943) U1.35@137.989,83.88 ; U1.35@138.169,83.178 ccw(c137.539,82.548) 137.539,83.439 ccw(c137.539,84.33) U1.35@138.169,83.7 ; U1.35@138.691,83.178 cw(c139.321,82.548) 139.321,83.439 cw(c139.321,84.33) U1.35@138.691,83.7 ; U1.35@138.871,82.998 cw(c139.934,81.935) 139.934,83.439 cw(c139.934,84.943) U1.35@138.871,83.88 ; P0.5@142.91,86.202 cw(c141.406,86.202) 142.469,85.138 cw(c143.533,84.075) P0.5@143.533,85.579 ; P0.5@143.164,86.202 cw(c142.273,86.202) 142.903,85.572 cw(c143.533,84.942) P0.5@143.533,85.833
P0.5: 103.6 P0.6 U1.34 | length 30.1
  Bottom Layer w0.254: 103.6@130.429,78.994 132.334,80.899 U1.34@138.43,80.899 140.77,80.899 P0.6@143.533,83.662 ; 103.6@130.429,79.363 ccw(c130.429,80.254) 131.059,79.624 ccw(c131.689,78.994) 103.6@130.798,78.994 ; 103.6@130.429,79.617 ccw(c130.429,81.121) 131.493,80.058 ccw(c132.556,78.994) 103.6@131.052,78.994 ; U1.34@137.989,80.458 ccw(c136.926,79.395) 136.926,80.899 ccw(c136.926,82.403) U1.34@137.989,81.34 ; U1.34@138.169,80.638 ccw(c137.539,80.008) 137.539,80.899 ccw(c137.539,81.79) U1.34@138.169,81.16 ; U1.34@138.691,80.638 cw(c139.321,80.008) 139.321,80.899 cw(c139.321,81.79) U1.34@138.691,81.16 ; U1.34@138.871,80.458 cw(c139.934,79.395) 139.934,80.899 cw(c139.934,82.403) U1.34@138.871,81.34 ; P0.6@142.91,83.662 cw(c141.406,83.662) 142.469,82.598 cw(c143.533,81.535) P0.6@143.533,83.039 ; P0.6@143.164,83.662 cw(c142.273,83.662) 142.903,83.032 cw(c143.533,82.402) P0.6@143.533,83.293
P0.6: 103.7 P0.7 U1.33 | length 30.1
  Bottom Layer w0.254: 103.7@130.429,76.454 132.334,78.359 U1.33@138.43,78.359 140.77,78.359 P0.7@143.533,81.122 ; 103.7@130.429,76.823 ccw(c130.429,77.714) 131.059,77.084 ccw(c131.689,76.454) 103.7@130.798,76.454 ; 103.7@130.429,77.077 ccw(c130.429,78.581) 131.493,77.518 ccw(c132.556,76.454) 103.7@131.052,76.454 ; U1.33@137.989,77.918 ccw(c136.926,76.855) 136.926,78.359 ccw(c136.926,79.863) U1.33@137.989,78.8 ; U1.33@138.169,78.098 ccw(c137.539,77.468) 137.539,78.359 ccw(c137.539,79.25) U1.33@138.169,78.62 ; U1.33@138.691,78.098 cw(c139.321,77.468) 139.321,78.359 cw(c139.321,79.25) U1.33@138.691,78.62 ; U1.33@138.871,77.918 cw(c139.934,76.855) 139.934,78.359 cw(c139.934,79.863) U1.33@138.871,78.8 ; P0.7@142.91,81.122 cw(c141.406,81.122) 142.469,80.058 cw(c143.533,78.995) P0.7@143.533,80.499 ; P0.7@143.164,81.122 cw(c142.273,81.122) 142.903,80.492 cw(c143.533,79.862) P0.7@143.533,80.753
P0.7: 103.8 P0.8 U1.32 | length 30.1
  Bottom Layer w0.254: 103.8@130.429,73.914 132.334,75.819 U1.32@138.43,75.819 140.77,75.819 P0.8@143.533,78.582 ; 103.8@130.429,74.283 ccw(c130.429,75.174) 131.059,74.544 ccw(c131.689,73.914) 103.8@130.798,73.914 ; 103.8@130.429,74.537 ccw(c130.429,76.041) 131.493,74.978 ccw(c132.556,73.914) 103.8@131.052,73.914 ; U1.32@137.989,75.378 ccw(c136.926,74.315) 136.926,75.819 ccw(c136.926,77.323) U1.32@137.989,76.26 ; U1.32@138.169,75.558 ccw(c137.539,74.928) 137.539,75.819 ccw(c137.539,76.71) U1.32@138.169,76.08 ; U1.32@138.691,75.558 cw(c139.321,74.928) 139.321,75.819 cw(c139.321,76.71) U1.32@138.691,76.08 ; U1.32@138.871,75.378 cw(c139.934,74.315) 139.934,75.819 cw(c139.934,77.323) U1.32@138.871,76.26 ; P0.8@142.91,78.582 cw(c141.406,78.582) 142.469,77.518 cw(c143.533,76.455) P0.8@143.533,77.959 ; P0.8@143.164,78.582 cw(c142.273,78.582) 142.903,77.952 cw(c143.533,77.322) P0.8@143.533,78.213
P1.0: P1.0.2 P1.1 U1.1 | length 29.6
  Bottom Layer w0.254: P1.0.2@108.839,91.44 113.634,96.235 P1.1@115.847,96.235 119.456,96.235 119.552,96.139 U1.1@123.19,96.139 ; P1.0.2@108.839,91.938 ccw(c108.839,93.14) 109.689,92.29 ccw(c110.539,91.44) P1.0.2@109.337,91.44 ; P1.1@115.406,95.794 ccw(c114.343,94.731) 114.343,96.235 ccw(c114.343,97.739) P1.1@115.406,96.676 ; P1.1@115.586,95.974 ccw(c114.956,95.344) 114.956,96.235 ccw(c114.956,97.126) P1.1@115.586,96.496 ; P1.1@116.108,95.974 cw(c116.738,95.344) 116.738,96.235 cw(c116.738,97.126) P1.1@116.108,96.496 ; P1.1@116.288,95.794 cw(c117.351,94.731) 117.351,96.235 cw(c117.351,97.739) P1.1@116.288,96.676 ; U1.1@122.749,95.698 ccw(c121.686,94.635) 121.686,96.139 ccw(c121.686,97.643) U1.1@122.749,96.58 ; U1.1@122.929,95.878 ccw(c122.299,95.248) 122.299,96.139 ccw(c122.299,97.03) U1.1@122.929,96.4
P1.1: P1.1.2 P1.2 U1.2 | length 30.4
  Bottom Layer w0.254: P1.1.2@108.839,86.868 112.014,90.043 112.195,90.043 P1.2@115.847,93.695 119.456,93.695 119.552,93.599 U1.2@123.19,93.599 ; P1.1.2@108.839,87.366 ccw(c108.839,88.568) 109.689,87.718 ccw(c110.539,86.868) P1.1.2@109.337,86.868 ; P1.2@115.224,93.695 cw(c113.72,93.695) 114.783,92.631 cw(c115.847,91.568) P1.2@115.847,93.072 ; P1.2@115.478,93.695 cw(c114.587,93.695) 115.217,93.065 cw(c115.847,92.435) P1.2@115.847,93.326 ; P1.2@116.108,93.434 cw(c116.738,92.804) 116.738,93.695 cw(c116.738,94.586) P1.2@116.108,93.956 ; P1.2@116.288,93.254 cw(c117.351,92.191) 117.351,93.695 cw(c117.351,95.199) P1.2@116.288,94.136 ; U1.2@122.749,93.158 ccw(c121.686,92.095) 121.686,93.599 ccw(c121.686,95.103) U1.2@122.749,94.04 ; U1.2@122.929,93.338 ccw(c122.299,92.708) 122.299,93.599 ccw(c122.299,94.49) U1.2@122.929,93.86
P1.2: P1.2.2 P1.3 U1.3 | length 45
  Bottom Layer w0.254: P1.2.2@108.839,82.296 123.825,82.296 124.333,82.804 124.333,89.916 U1.3@123.19,91.059 119.552,91.059 119.456,91.155 P1.3@115.847,91.155 ; P1.2.2@109.191,81.944 cw(c110.041,81.094) 110.041,82.296 cw(c110.041,83.498) P1.2.2@109.191,82.648 ; P1.3@116.108,90.894 cw(c116.738,90.264) 116.738,91.155 cw(c116.738,92.046) P1.3@116.108,91.416 ; P1.3@116.288,90.714 cw(c117.351,89.651) 117.351,91.155 cw(c117.351,92.659) P1.3@116.288,91.596 ; U1.3@122.749,90.618 ccw(c121.686,89.555) 121.686,91.059 ccw(c121.686,92.563) U1.3@122.749,91.5 ; U1.3@122.929,90.798 ccw(c122.299,90.168) 122.299,91.059 ccw(c122.299,91.95) U1.3@122.929,91.32 ; U1.3@123.19,90.436 cw(c123.19,88.932) 124.254,89.995 cw(c125.317,91.059) U1.3@123.813,91.059 ; U1.3@123.19,90.69 cw(c123.19,89.799) 123.82,90.429 cw(c124.45,91.059) U1.3@123.559,91.059